# EAGLE board pic18f2550_controller (EAGLE 5.11)
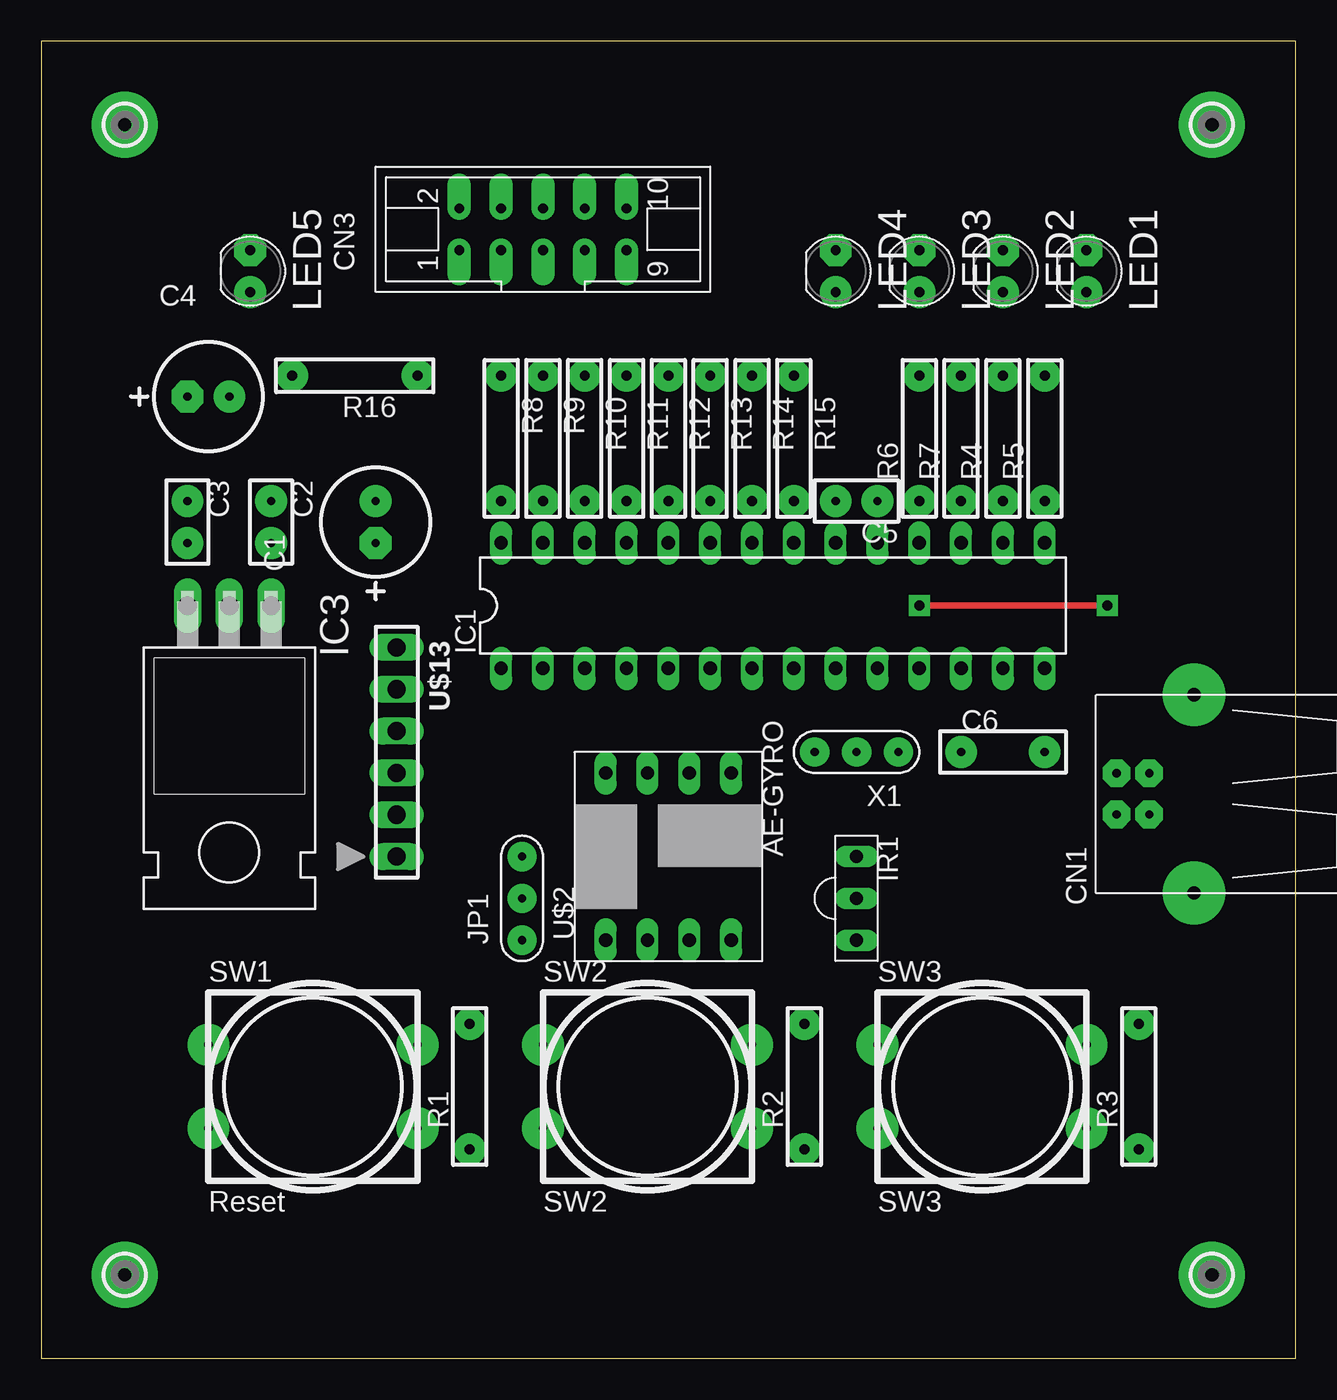
[diagram p0: board, top side]
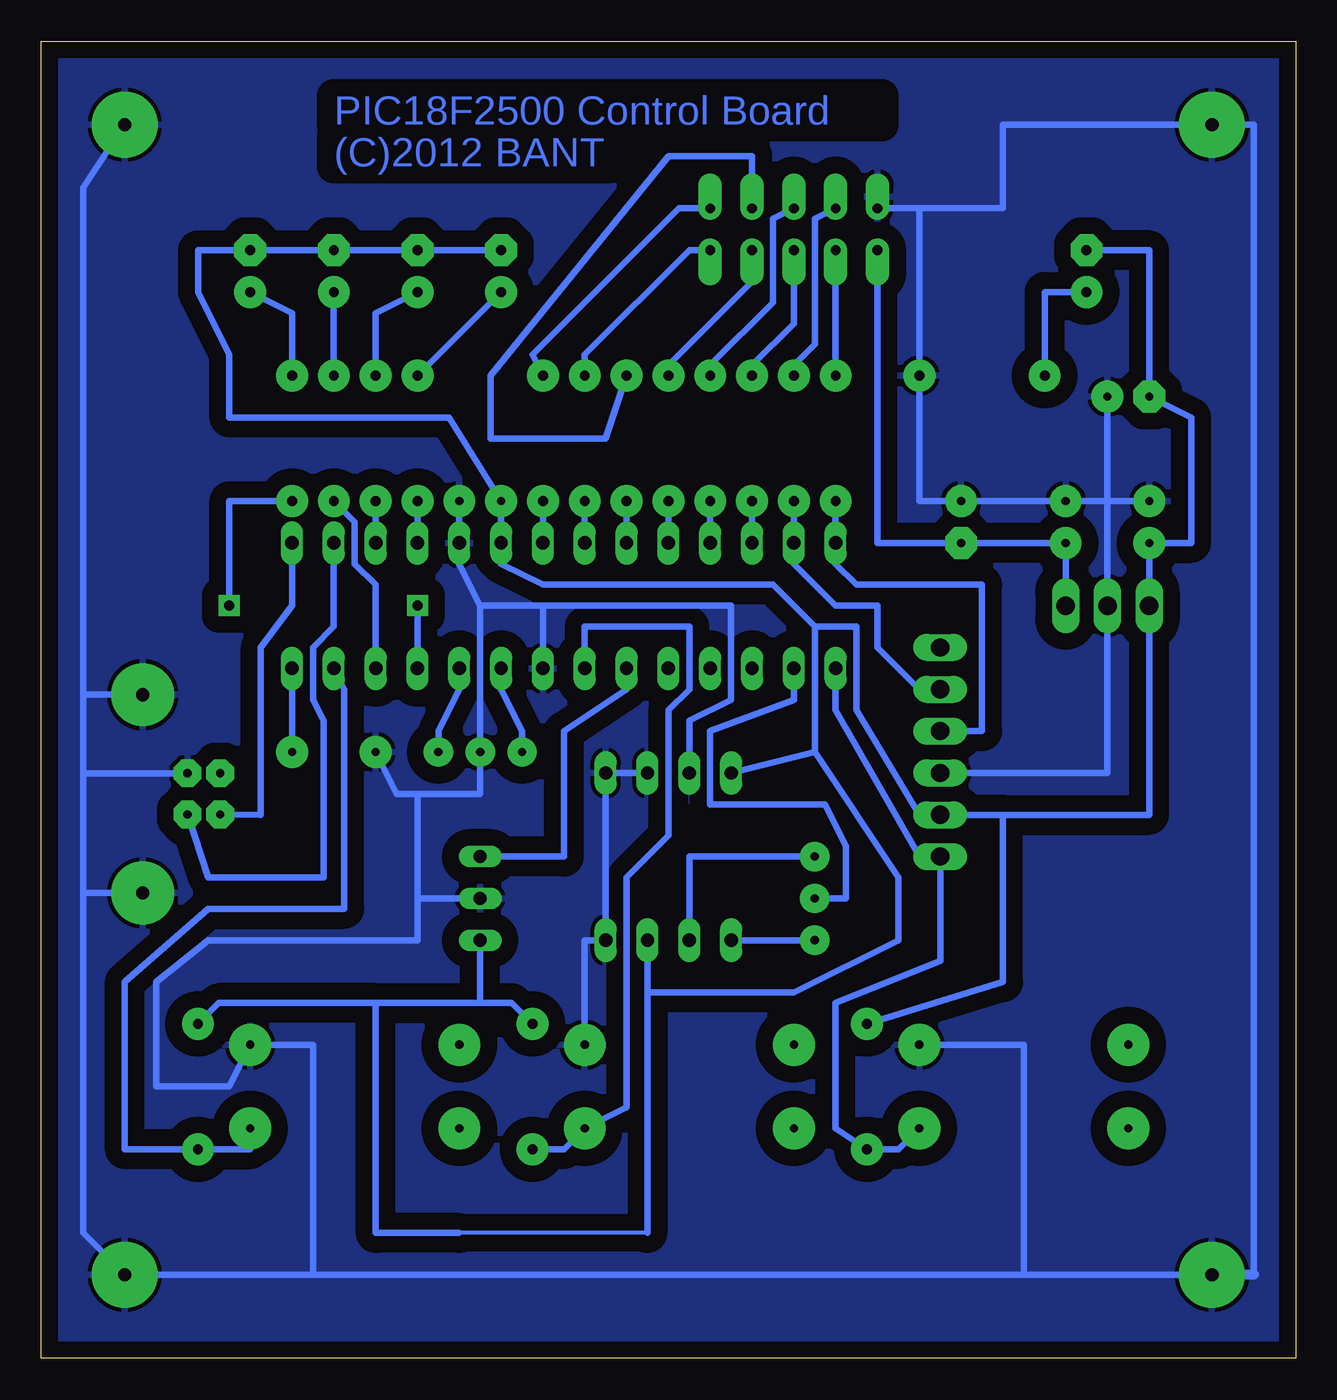
[diagram p1: board, bottom side, seen from below]

Size 76.2 x 80.01 mm. Coordinates in mm from the lower left corner, seen from the top.
Outline: 0,0 76.2,0 76.2,80.01 0,80.01 0,0
Copper layers (1*16): Top 0.035mm / dielectric 1.5mm / Bottom 0.035mm
Design rules "default": minimum track width 10mil, minimum drill 24mil, track to track 8mil, track to pad 8mil, pad to pad 8mil, via to via 8mil, smd to smd 8mil, copper to edge 40mil, drill to drill 8mil, minimum pad ring 10mil, minimum via ring 8mil, stop-mask expansion 4mil, vias tented up to drill 0mil, thermal gap 10mil

## Footprints (pad centres in the part's own frame; a part is rotated, then mirrored left to right if it is on the bottom)
CCAP_6.5 = drill 0.5 pad 1.93 octagon: + -1.27,0 | drill 0.5 pad 1.93 round: - 1.27,0
CAP_DIP_1 = drill 0.5 pad 1.93 round: 1 -1.27,0; 2 1.27,0
CAP_DIP_2 = drill 0.5 pad 1.93 round: 1 -2.54,0; 2 2.54,0
USB-B-H = drill 0.5 pad 1.676 octagon: D+ 0,1.25; D- 1.981,1.25; GND 0,-1.25; VBUS 1.981,-1.25 | drill 0.8 pad 3.81 round: F1 -2.718,6.02; F2 -2.718,-6.02
PSCON-10-W = drill 0.6 pad 1.422 offset: P$1 -1.27,5.08; P$2 1.27,5.08; P$3 -1.27,2.54; P$4 1.27,2.54; P$5 -1.27,0; P$6 1.27,0; P$7 -1.27,-2.54; P$8 1.27,-2.54; P$9 -1.27,-5.08; P$10 1.27,-5.08
DIL28 = drill 0.813 long: 1 -16.51,-3.81; 2 -13.97,-3.81; 3 -11.43,-3.81; 4 -8.89,-3.81; 5 -6.35,-3.81; 6 -3.81,-3.81; 7 -1.27,-3.81; 8 1.27,-3.81; 9 3.81,-3.81; 10 6.35,-3.81; 11 8.89,-3.81; 12 11.43,-3.81; 13 13.97,-3.81; 14 16.51,-3.81; 15 16.51,3.81; 16 13.97,3.81; 17 11.43,3.81; 18 8.89,3.81; 19 6.35,3.81; 20 3.81,3.81; 21 1.27,3.81; 22 -1.27,3.81; 23 -3.81,3.81; 24 -6.35,3.81; 25 -8.89,3.81; 26 -11.43,3.81; 27 -13.97,3.81; 28 -16.51,3.81
TO220H = drill 1.118 long: 1 -2.54,-7.62; 2 0,-7.62; 3 2.54,-7.62
PL-IRM0208 = drill 0.8 long: 1 -2.54,0; 2 0,0; 3 2.54,0
CSTLS = drill 0.5 pad 1.778 round: 1 -2.54,0; 2 0,0; 3 2.54,0
LED_3MM_VIRT_2 = drill 0.6 pad 1.93 octagon: A -1.27,0 | drill 0.6 pad 1.93 round: K 1.27,0
PAD-2.1 = drill 0.8 pad 4 round: B2,1 0,0
R_0.125W_3 = drill 0.6 pad 1.93 round: 1 -3.81,0; 2 3.81,0
SS-BIG_SWITCH = drill 0.5 pad 2.54 round: 1 0,10.16; 2 12.7,10.16; 3 0,5.08; 4 12.7,5.08
AE-GYRO = drill 0.813 long: 1 -5.08,3.81; 2 -5.08,1.27; 3 -5.08,-1.27; 4 -5.08,-3.81; 5 5.08,-3.81; 6 5.08,-1.27; 7 5.08,1.27; 8 5.08,3.81
PIC_ICSP = drill 1.1 long: MCLR -6.35,0; NC 6.35,0; PGC 3.81,0; PGD 1.27,0; VDD -3.81,0; VSS -1.27,0

## Placement (x,y rotation side)
C1  47u/35V  [CCAP_6.5]  20.32,50.8 90 top
C2  0.1u  [CAP_DIP_1]  13.97,50.8 270 top
C3  0.1u  [CAP_DIP_1]  8.89,50.8 270 top
C4  10u/16V  [CCAP_6.5]  10.16,58.42 0 top
C5  0.1u  [CAP_DIP_1]  49.53,52.07 180 top
C6  0.47u  [CAP_DIP_2]  58.42,36.83 0 top
CN1  USB-B-H  [USB-B-H]  67.31,34.29 180 top
CN3  [PSCON-10-W]  30.48,68.58 90 top
IC1  PIC18F2550  [DIL28]  44.45,45.72 0 top
IC3  7805HORIZ  [TO220H]  11.43,38.1 180 top
IR1  PL-IRM0101-3  [PL-IRM0208]  49.53,27.94 270 top
JP1  [CSTLS]  29.21,27.94 90 top
LED1  LED  [LED_3MM_VIRT_2]  63.5,66.04 270 top
LED2  LED  [LED_3MM_VIRT_2]  58.42,66.04 270 top
LED3  LED  [LED_3MM_VIRT_2]  53.34,66.04 270 top
LED4  LED  [LED_3MM_VIRT_2]  48.26,66.04 270 top
LED5  LED  [LED_3MM_VIRT_2]  12.7,66.04 270 top
MT1  MOUNT11  [PAD-2.1]  5.08,74.93 0 top
MT2  MOUNT2  [PAD-2.1]  5.08,5.08 0 top
MT3  MOUNT3  [PAD-2.1]  71.12,5.08 0 top
MT4  MOUNT4  [PAD-2.1]  71.12,74.93 0 top
R1  10k  [R_0.125W_3]  26.04,16.51 90 top
R2  10k  [R_0.125W_3]  46.35,16.51 90 top
R3  10k  [R_0.125W_3]  66.67,16.51 90 top
R4  1k  [R_0.125W_3]  58.42,55.88 90 top
R5  1k  [R_0.125W_3]  60.96,55.88 90 top
R6  1k  [R_0.125W_3]  53.34,55.88 90 top
R7  1k  [R_0.125W_3]  55.88,55.88 90 top
R8  330  [R_0.125W_3]  27.94,55.88 270 top
R9  330  [R_0.125W_3]  30.48,55.88 270 top
R10  330  [R_0.125W_3]  33.02,55.88 270 top
R11  330  [R_0.125W_3]  35.56,55.88 270 top
R12  330  [R_0.125W_3]  38.1,55.88 270 top
R13  330  [R_0.125W_3]  40.64,55.88 270 top
R14  330  [R_0.125W_3]  43.18,55.88 270 top
R15  330  [R_0.125W_3]  45.72,55.88 270 top
R16  1k  [R_0.125W_3]  19.05,59.69 180 top
SW1  Reset  [SS-BIG_SWITCH]  10.16,8.89 0 top
SW2  SW2  [SS-BIG_SWITCH]  30.48,8.89 0 top
SW3  SW3  [SS-BIG_SWITCH]  50.8,8.89 0 top
U$2  AE-GYRO  [AE-GYRO]  38.1,30.48 90 top
U$13  PIC_ICSP  [PIC_ICSP]  21.59,36.83 90 top
X1  20Mhz  [CSTLS]  49.53,36.83 180 top

## Library data of the parts
C1-C6 IC3 JP1 LED1-LED5 MT1-MT4 R1-R16 X1 = MyLib
CN1 = con-usb2
CN3 SW1-SW3 U$2 U$13 = bant
IC1 = pic18f2550
IR1 = keinSoft-01

## Nets
5V: C3.2 C4.+ C5.2 IC1.20 IC3.3 IR1.3 LED1.A LED2.A LED3.A LED4.A LED5.A R1.2 R2.2 R3.2 U$2.3 U$2.8 U$13.VDD
9V: C1.+ C2.2 CN3.P$1 IC3.1
GND: C1.- C2.1 C3.1 C4.- C5.1 C6.1 CN1.F1 CN1.F2 CN1.GND CN3.P$2 IC1.8 IC1.19 IC3.2 IR1.2 MT1.B2,1 MT2.B2,1 MT3.B2,1 MT4.B2,1 R16.1 SW1.2 SW2.2 SW3.2 U$2.4 U$2.5 U$2.6 U$2.7 U$13.VSS X1.2
N$1: JP1.1 U$2.1
N$2: JP1.3 U$2.2
N$3: LED4.K R6.2
N$4: IC1.2 JP1.2
N$5: LED1.K R5.2
N$6: IC1.9 X1.3
N$7: IC1.10 X1.1
N$8: IC1.11 R5.1
N$9: C6.2 IC1.14
N$10: IC1.12 R4.1
N$11: CN1.D- IC1.15
N$12: CN1.D+ IC1.16
N$13: LED2.K R4.2
N$14: LED3.K R7.2
N$15: IC1.18 R6.1
N$16: IC1.17 R7.1
N$17: CN3.P$3 R8.1
N$18: CN3.P$4 R9.1
N$19: IC1.26 R10.2
N$20: IC1.28 R8.2 U$13.PGD
N$21: IC1.27 R9.2 U$13.PGC
N$22: CN3.P$5 R10.1
N$23: IC1.25 R11.2
N$24: CN3.P$6 R11.1
N$25: IC1.24 R12.2
N$26: CN3.P$7 R12.1
N$27: IC1.6 IR1.1
N$28: IC1.23 R13.2
N$29: CN3.P$8 R13.1
N$30: IC1.22 R14.2
N$31: CN3.P$9 R14.1
N$32: IC1.21 R15.2
N$33: CN3.P$10 R15.1
N$37: LED5.K R16.2
RESET: IC1.1 R1.1 SW1.4 U$13.MCLR
SW2: IC1.7 R2.1 SW2.4
SW3: IC1.13 R3.1 SW3.4
VCC: CN1.VBUS

## Tracks (layer width: path | path; a pad name or v marks a point on that pad's centre or on a via)
5V
  Bottom 0.254: 39.37,7.62 50.8,7.62
  Bottom 0.406: 39.37,22.23 39.37,7.62 | 39.37,22.23 U$2.3 | 55.88,21.59 49.53,21.59 | 29.21,44.45 31.75,46.99 45.72,46.99 48.26,48.26 IC1.20 C5.2 51.44,57.15 64.77,57.15 64.77,60.96 66.67,64.77 66.67,67.31 LED1.A LED2.A LED3.A LED4.A | 29.21,44.45 26.67,44.45 26.67,39.37 22.86,33.02 U$13.VDD 17.78,33.02 | 17.78,33.02 8.89,33.02 IC3.3 C3.2 6.35,49.53 6.35,57.15 C4.+ 8.89,67.31 LED5.A | 50.8,7.62 55.88,7.62 55.88,21.59 | 29.21,44.45 29.21,36.83 | 17.78,33.02 17.78,22.86 R1.2 | 29.21,36.83 U$2.8 | 29.21,36.83 24.13,29.21 24.13,25.4 30.48,22.23 39.37,22.23 | 49.53,21.59 IR1.3 | 49.53,21.59 47.62,21.59 R2.2 | 55.88,21.59 65.41,21.59 R3.2
9V
  Bottom 0.406: IC3.1 C2.2 C1.+ 25.4,49.53 CN3.P$1
GND
  Bottom 0.406: U$13.VSS 11.43,35.56 IC3.2 11.43,52.07 | 11.43,52.07 C2.1 C1.- 22.86,52.07 R16.1 22.86,69.85 | 11.43,52.07 C3.1 | C5.1 IC1.19 50.8,48.26 49.53,45.72 | U$2.7 36.83,38.73 34.29,40.01 34.29,45.72 45.72,45.72 | U$2.6 U$2.5 U$2.4 43.18,25.4 SW2.2 | 45.72,45.72 49.53,45.72 | 49.53,45.72 X1.2 49.53,34.29 53.34,34.29 | 45.72,45.72 IC1.8 | C6.1 54.61,34.29 53.34,34.29 | 73.66,28.27 73.66,35.54 | 73.66,35.54 73.66,40.31 | 73.66,40.31 CN1.F2 | 73.66,35.54 CN1.GND | 73.66,40.31 73.66,71.12 MT4.B2,1 | 11.43,52.07 C4.- | 2.54,5.08 2.54,74.93 MT1.B2,1 17.78,74.93 17.78,69.85 22.86,69.85 | 53.34,27.94 53.34,25.4 66.04,25.4 69.22,22.86 69.22,16.51 64.77,16.51 SW3.2 59.69,19.05 59.69,5.08 | 53.34,27.94 IR1.2 | 53.34,34.29 53.34,27.94 | 22.86,69.85 CN3.P$2 | SW1.2 16.51,19.05 16.51,5.08 | 73.66,28.27 CN1.F1 | 73.66,28.27 73.66,7.62 MT3.B2,1 59.69,5.08 | 16.51,5.08 59.69,5.08 | MT2.B2,1 16.51,5.08
  Bottom 0.61: 2.54,5.08 MT2.B2,1
  pour Bottom (isolate 1.016): 0,80.01 0,0 76.2,0 76.2,80.01
N$1
  Bottom 0.406: JP1.1 U$2.1
N$2
  Bottom 0.406: JP1.3 36.83,30.48 U$2.2
N$3
  Bottom 0.406: LED4.K R6.2
N$4
  Bottom 0.406: IC1.2 30.48,40.01 35.56,38.1 35.56,33.66 28.57,33.66 27.3,31.11 27.3,27.94 JP1.2
N$5
  Bottom 0.406: R5.2 60.96,63.5 LED1.K
N$6
  Bottom 0.406: IC1.9 48.26,40.64 46.99,38.1 X1.3
N$7
  Bottom 0.406: IC1.10 50.8,40.64 52.07,38.1 X1.1
N$8  (via drill 0.6 pad 1.27)
  Top 0.406: v53.34,45.72 v64.77,45.72
  Bottom 0.406: R5.1 64.77,52.07 v64.77,45.72 | IC1.11 v53.34,45.72
N$9
  Bottom 0.406: C6.2 IC1.14
N$10
  Bottom 0.406: IC1.12 55.88,46.99 57.15,48.26 57.15,50.8 R4.1
N$11
  Bottom 0.406: IC1.15 60.96,45.72 62.87,43.18 62.87,33.02 CN1.D-
N$12
  Bottom 0.406: IC1.16 58.42,44.45 59.69,43.18 59.69,40.01 59.05,38.73 59.05,29.21 66.04,29.21 CN1.D+
N$13
  Bottom 0.406: R4.2 LED2.K
N$14
  Bottom 0.406: R7.2 55.88,63.5 LED3.K
N$15
  Bottom 0.406: IC1.18 R6.1
N$16
  Bottom 0.406: IC1.17 R7.1
N$17
  Bottom 0.406: R8.1 CN3.P$3
N$18
  Bottom 0.406: CN3.P$4 29.21,69.22 29.21,61.59 30.48,60.33 R9.1
N$19
  Bottom 0.406: IC1.26 R10.2
N$20
  Bottom 0.406: R8.2 IC1.28 27.94,48.26 26.67,46.99 19.05,46.99 19.05,38.1 U$13.PGD
N$21
  Bottom 0.406: R9.2 IC1.27 30.48,48.26 27.94,45.72 25.4,45.72 25.4,43.18 22.86,40.64 U$13.PGC
N$22
  Bottom 0.406: CN3.P$5 30.48,62.87 33.02,60.33 R10.1
N$23
  Bottom 0.406: IC1.25 R11.2
N$24
  Bottom 0.406: CN3.P$6 31.75,69.22 31.75,64.14 35.56,60.33 R11.1
N$25
  Bottom 0.406: IC1.24 R12.2
N$26
  Bottom 0.406: CN3.P$7 33.02,65.41 38.1,60.33 R12.1
N$27
  Bottom 0.406: IC1.6 40.64,40.64 44.45,38.1 44.45,30.48 IR1.1
N$28
  Bottom 0.406: IC1.23 R13.2
N$29
  Bottom 0.406: CN3.P$8 33.02,73.03 38.1,73.03 48.9,59.69 48.9,55.88 41.91,55.88 R13.1
N$30
  Bottom 0.406: IC1.22 R14.2
N$31
  Bottom 0.406: CN3.P$9 36.83,67.31 43.18,60.96 R14.1
N$32
  Bottom 0.406: IC1.21 R15.2
N$33
  Bottom 0.406: CN3.P$10 37.47,69.85 46.35,60.96 R15.1
N$37
  Bottom 0.406: LED5.K 15.24,64.77 R16.2
RESET
  Bottom 0.406: IC1.1 27.94,39.37 22.86,30.48 U$13.MCLR 21.59,24.13 27.94,21.59 27.94,13.97 R1.1 24.13,12.7 SW1.4
SW2
  Bottom 0.406: IC1.7 43.18,44.45 36.83,44.45 36.83,40.64 38.1,39.37 38.1,31.75 40.64,29.21 40.64,15.24 SW2.4 44.45,12.7 R2.1
SW3
  Bottom 0.406: IC1.13 57.78,40.64 57.78,27.3 66.04,27.3 71.12,22.86 71.12,12.7 R3.1 63.5,12.7 SW3.4

## Text on the board
Bottom: PIC18F2500 Control Board | (C)2012 BANT